# Altium PCB TIDA_010057.PcbDoc (part 4 of 9)
Units mil, origin at the board's own origin, x right, y up, seen from the top; angles counter-clockwise.
Board outline 1771.65 x 3543.31 mil, 12 copper layers (Top Layer, GND1, Signal Layer 1, GND2, POWER1, POWER2, GND4, POWER3, GND6, Signal Layer 2, GND7, Bottom Layer), stack 62.79 mil thick; 593 components, 374 nets, 1805 pads, 1029 vias.
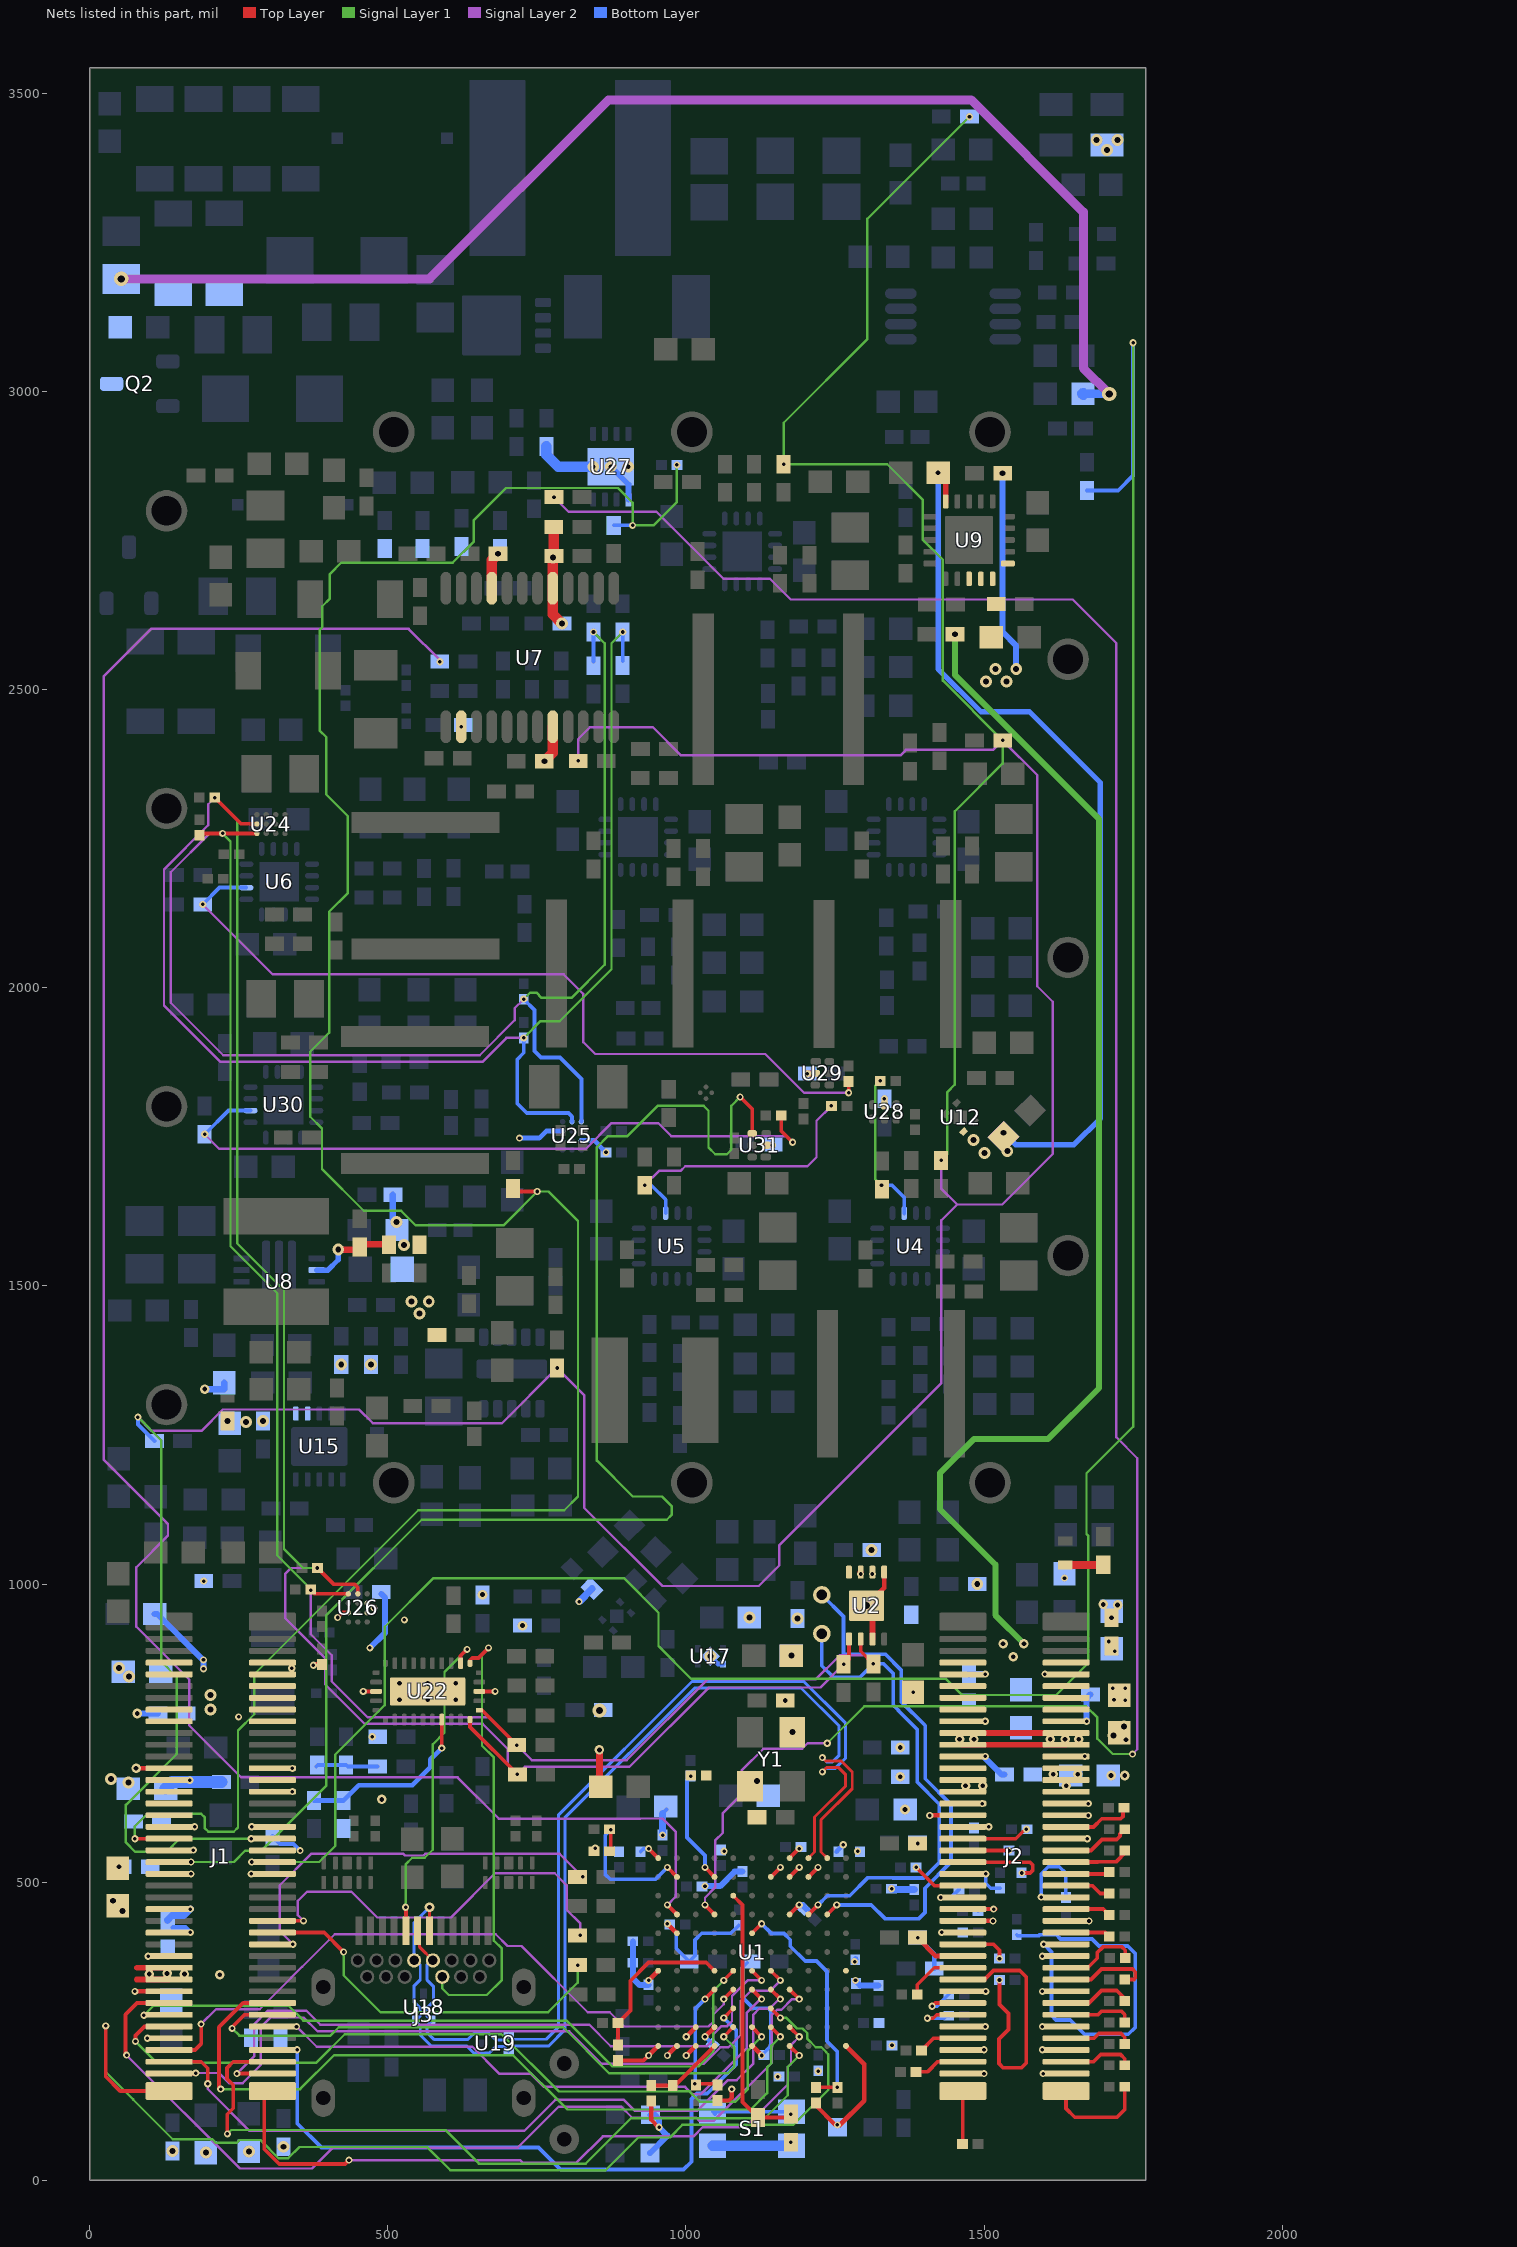
[diagram p13: the nets of this part, all layers, seen from the top]

## Part data (continued)
R49 R56 R65 R72 R96 R112 R128 R134: "RES, 0, 1%, 0.1 W, AEC-Q200 Grade 0, 0603", Manufacturer="Stackpole Electronics Inc", Power_W=0.1, Supplier Part Number 1=RMCF0603ZT0R00CT-ND, TempCo=ppm/C, Tolerance_%=1, Value1=1%, Value2=0.1W, Value_Code=0, AEC Category=Q200, AEC Grade=0, AEC Qualified=Y, ComponentLink1Description="Datasheet link", ComponentLink1URL=https://www.seielect.com/Catalog/SEI-RMCF_RMCP.pdf, CompType=Resistor, Green_EU RoHS="Passed with Exemption", Green_EU RoHS-2=Incomplete, Green_Lifecycle=Active, Green_REACh=Passed, LatestRevisionDate=2017-06-13, MountType=SMT, PackageReference=0603, PartNumber=RMCF0603ZT0R00, Published=2008-06-26, Publisher="Texas Instruments", Res_ohm=0, RoHS=Y, SizeArea_mm2=1.28, SizeX_mm=1.6, SizeY_mm=0.8, SizeZ_mm=1, Supplier 1=Digi-Key, SymbolVersion=2009-05-29, Technology="Thick Film", U/M=EA, ValueDisplayed=0
R50 R74 R97 R104 R129: "RES, 4.99 k, 1%, 0.1 W, AEC-Q200 Grade 0, 0402", Manufacturer=Panasonic, Power_W=0.1, Supplier Part Number 1=P4.99KLCT-ND, TempCo="100 ppm/C", Tolerance_%=1, Value1=1%, Value2=0.1W, Value_Code=4k99, ValueDisplayed=4.99k, AEC Category=Q200, AEC Grade=0, AEC Qualified=Y, ComponentLink1Description="Datasheet link", ComponentLink1URL=http://industrial.panasonic.com/cdbs/www-data/pdf/RDA0000/AOA0000C86.pdf, CompType=Resistor, EIA_Code=E96, Green_EU RoHS="Passed with Exemption", Green_EU RoHS-2=Passed, Green_Lifecycle=Active, Green_REACh=Passed, LatestRevisionDate=2017-06-12, MountType=SMT, PackageReference=0402, PartNumber=ERJ-2RKF4991X, Published=2008-06-26, Publisher="Texas Instruments", Res_ohm=4990, RoHS=Y, SizeArea_mm2=0.5, SizeX_mm=1, SizeY_mm=0.5, SizeZ_mm=0.6, Supplier 1=Digi-Key, Supplier 2=Newark, Supplier 3=Mouser, Supplier Part Number 2=73T6529, Supplier Part Number 3=667-ERJ-2RKF4991X, SymbolVersion=2009-05-29, Technology="Thick Film", U/M=EA, VDC_V=50
R51 R58 R76 R98 R105 R115 R131: "RES, 10.0 k, 1%, 0.063 W, AEC-Q200 Grade 0, 0402", Manufacturer="KOA Speer", Power_W=0.063, Supplier Part Number 1=660-RK73H1ETTP1002F, TempCo="100 ppm/C", Tolerance_%=1, Value1=1%, Value2=0.063W, Value_Code=10k0, ValueDisplayed=10.0k, AEC Category=Q200, AEC Grade=0, AEC Qualified=Y, ComponentLink1Description="Datasheet link", ComponentLink1URL=http://www.koaspeer.com/catimages/Products/RK73H/RK73H.pdf, CompType=Resistor, EIA_Code=E96, LatestRevisionDate=2017-06-12, MountType=SMT, PackageReference=0402, PartNumber=RK73H1ETTP1002F, Published=2008-06-26, Publisher="Texas Instruments", Res_ohm=10000, RoHS=Y, SizeArea_mm2=0.5, SizeX_mm=1, SizeY_mm=0.5, SizeZ_mm=0.6, Supplier 1=Mouser, SymbolVersion=2009-05-29, Technology="Thick Film", U/M=EA, VDC_V=50
R52 R101 R107 R121 R133: "RES, 130, 5%, 0.063 W, 0402", Manufacturer=Vishay-Dale, Power_W=0.063, Supplier Part Number 1=541-130JCT-ND, TempCo="200 ppm/C", Tolerance_%=5, Value1=5%, Value2=0.063W, Value_Code=130R, ValueDisplayed=130, AEC Category=Q200, AEC Qualified=?, ComponentLink1Description="Datasheet link", ComponentLink1URL=http://www.vishay.com/docs/20035/dcrcwe3.pdf, CompType=Resistor, EIA_Code=E24, Green_EU RoHS="Passed with Exemption", Green_EU RoHS-2=Passed, Green_Lifecycle=Active, Green_REACh=Passed, LatestRevisionDate=2017-06-12, MountType=SMT, PackageReference=0402, PartNumber=CRCW0402130RJNED, Published=2008-06-26, Publisher="Texas Instruments", Res_ohm=130, RoHS=Y, SizeArea_mm2=0.5, SizeX_mm=1, SizeY_mm=0.5, SizeZ_mm=0.6, Supplier 1=Digi-Key, Supplier 2=Newark, Supplier 3=Mouser, Supplier Part Number 2=89M6605, Supplier Part Number 3=71-CRCW0402130RJNED, SymbolVersion=2009-05-29, Technology="Thick Film", U/M=EA, VDC_V=50
R54 R71 R126: "RES, 0, 1%, 0.5 W, 0805", Manufacturer=Keystone, Power_W=0.5, Supplier Part Number 1=36-5106CT-ND, TempCo=ppm/C, Tolerance_%=1, Value1=1%, Value2=0.5W, Value_Code=0, AEC Category=Q200, AEC Grade=N/A, AEC Qualified=N, ComponentLink1Description="Datasheet link", ComponentLink1URL=http://www.keyelco.com/product-pdf.cfm?p=14039, CompType=Resistor, LatestRevisionDate=2017-06-23, MountType=SMT, PackageReference=0805, PartNumber=5106, Published=2008-06-26, Publisher="Texas Instruments", Res_ohm=0, RoHS=Y, SizeArea_mm2=2.5, SizeX_mm=2, SizeY_mm=1.25, SizeZ_mm=0.84, Supplier 1=Digi-Key, SymbolVersion=2009-05-29, Technology="Metal Element", U/M=EA, ValueDisplayed=0
R57: "RES, 12.4 k, 1%, 0.063 W, 0402", Manufacturer=Vishay-Dale, Power_W=0.063, Supplier Part Number 1=541-12.4KLCT-ND, TempCo="100 ppm/C", Tolerance_%=1, Value1=1%, Value2=0.063W, Value_Code=12k4, ValueDisplayed=12.4k, AEC Category=Q200, AEC Qualified=?, ComponentLink1Description="Datasheet link", ComponentLink1URL=http://www.vishay.com/docs/20035/dcrcwe3.pdf, CompType=Resistor, EIA_Code=E96, Green_EU RoHS="Passed with Exemption", Green_EU RoHS-2=Passed, Green_Lifecycle=Active, Green_REACh=Passed, LatestRevisionDate=2017-06-12, MountType=SMT, PackageReference=0402, PartNumber=CRCW040212K4FKED, Published=2008-06-26, Publisher="Texas Instruments", Res_ohm=12400, RoHS=Y, SizeArea_mm2=0.5, SizeX_mm=1, SizeY_mm=0.5, SizeZ_mm=0.6, Supplier 1=Digi-Key, Supplier 2=Newark, Supplier 3=Mouser, Supplier Part Number 2=52K6648, Supplier Part Number 3=71-CRCW0402-12.4K-E3, SymbolVersion=2009-05-29, Technology="Thick Film", U/M=EA, VDC_V=50
R59: library part CMP-0026845-3, "RES, 160, 5%, 0.063 W, AEC-Q200 Grade 0, 0402", Manufacturer=Vishay-Dale, Power_W=63mW, Supplier Part Number 1=541-160JCT-ND, TempCo="200 ppm/C", Tolerance_%=5%, Value2=0.063W, Value_Code=160R, ValueDisplayed=160, AEC Category=Q200, AEC Grade=0, AEC Qualified=Y, ComponentLink1Description="Datasheet link", ComponentLink1URL=http://www.vishay.com/docs/20035/dcrcwe3.pdf, CompType=Resistor, EIA_Code=E24, MountType=SMT, PackageReference=0402, PartNumber=CRCW0402160RJNED, Res_ohm=160, RoHS=E, SizeArea_mm2=0.5, SizeX_mm=1, SizeY_mm=0.5, SizeZ_mm=0.6, Supplier 1=Digi-Key, Supplier 2=Mouser, Supplier Part Number 2=71-CRCW0402160RJNED, Technology="Thick Film", Value1=5%, VDC_V=50V
R60 R61 R100 R106 R116 R119 R132: "RES, 383 k, 1%, 0.063 W, 0402", Manufacturer=Vishay-Dale, Power_W=0.063, Supplier Part Number 1=541-383KLCT-ND, TempCo="100 ppm/C", Tolerance_%=1, Value1=1%, Value2=0.063W, Value_Code=383k, AEC Category=Q200, AEC Qualified=?, ComponentLink1Description="Datasheet link", ComponentLink1URL=http://www.vishay.com/docs/20035/dcrcwe3.pdf, CompType=Resistor, EIA_Code=E96, Green_EU RoHS="Passed with Exemption", Green_EU RoHS-2=Passed, Green_Lifecycle=Active, Green_REACh=Passed, LatestRevisionDate=2017-06-12, MountType=SMT, PackageReference=0402, PartNumber=CRCW0402383KFKED, Published=2008-06-26, Publisher="Texas Instruments", Res_ohm=383000, RoHS=Y, SizeArea_mm2=0.5, SizeX_mm=1, SizeY_mm=0.5, SizeZ_mm=0.6, Supplier 1=Digi-Key, Supplier 2=Newark, Supplier 3=Mouser, Supplier Part Number 2=52K7024, Supplier Part Number 3=71-CRCW0402-383K-E3, SymbolVersion=2009-05-29, Technology="Thick Film", U/M=EA, ValueDisplayed=383k, VDC_V=50
R82 R83 R84 R85 R86 R87 R88 R89 R160: "RES, 18, 5%, 0.063 W, 0402", Manufacturer=Vishay-Dale, Power_W=0.063, Supplier Part Number 1=541-18JCT-ND, TempCo="200 ppm/C", Tolerance_%=5, Value1=5%, Value2=0.063W, Value_Code=18R0, ValueDisplayed=18, AEC Category=Q200, AEC Qualified=?, ComponentLink1Description="Datasheet link", ComponentLink1URL=http://www.vishay.com/docs/20035/dcrcwe3.pdf, CompType=Resistor, EIA_Code=E24, Green_EU RoHS="Passed with Exemption", Green_EU RoHS-2=Passed, Green_Lifecycle=Active, Green_REACh=Passed, LatestRevisionDate=2017-06-12, MountType=SMT, PackageReference=0402, PartNumber=CRCW040218R0JNED, Published=2008-06-26, Publisher="Texas Instruments", Res_ohm=18, RoHS=Y, SizeArea_mm2=0.5, SizeX_mm=1, SizeY_mm=0.5, SizeZ_mm=0.6, Supplier 1=Digi-Key, Supplier 2=Newark, Supplier 3=Mouser, Supplier Part Number 2=59M6708, Supplier Part Number 3=71-CRCW0402J-18-E3, SymbolVersion=2009-05-29, Technology="Thick Film", U/M=EA, VDC_V=50
R90 R148 R153 R161 R174 R238: "RES, 200 k, 1%, 0.1 W, 0402", Manufacturer=Panasonic, Power_W=0.1, Supplier Part Number 1=P200KLCT-ND, TempCo="100 ppm/C", Tolerance_%=1, Value1=1%, Value2=0.1W, Value_Code=200k, AEC Category=Q200, AEC Qualified=?, ComponentLink1Description="Datasheet link", ComponentLink1URL=http://industrial.panasonic.com/www-data/pdf/AOA0000/AOA0000CE2.pdf, CompType=Resistor, EIA_Code=E96, Green_EU RoHS="Passed with Exemption", Green_EU RoHS-2=Incomplete, Green_Lifecycle=Active, Green_REACh=Passed, LatestRevisionDate=2017-06-12, MountType=SMT, PackageReference=0402, PartNumber=ERJ-2RKF2003X, Published=2008-06-26, Publisher="Texas Instruments", Res_ohm=200000, RoHS=Y, SizeArea_mm2=0.5, SizeX_mm=1, SizeY_mm=0.5, SizeZ_mm=0.6, Supplier 1=Digi-Key, Supplier 2=Newark, Supplier 3=Mouser, Supplier Part Number 2=73T6488, Supplier Part Number 3=667-ERJ-2RKF2003X, SymbolVersion=2009-05-29, Technology="Thick Film", U/M=EA, ValueDisplayed=200k, VDC_V=50
  R153: VARIANT=DNP
R93: "RES, 44.2 k, 1%, 0.063 W, 0402", Manufacturer=Vishay-Dale, Power_W=0.063, Supplier Part Number 1=541-44.2KLCT-ND, TempCo="100 ppm/C", Tolerance_%=1, Value1=1%, Value2=0.063W, Value_Code=44k2, ValueDisplayed=44.2k, AEC Category=Q200, AEC Qualified=?, ComponentLink1Description="Datasheet link", ComponentLink1URL=http://www.vishay.com/docs/20035/dcrcwe3.pdf, CompType=Resistor, EIA_Code=E96, Green_EU RoHS="Passed with Exemption", Green_EU RoHS-2=Passed, Green_Lifecycle=Active, Green_REACh=Passed, LatestRevisionDate=2017-06-12, MountType=SMT, PackageReference=0402, PartNumber=CRCW040244K2FKED, Published=2008-06-26, Publisher="Texas Instruments", Res_ohm=44200, RoHS=Y, SizeArea_mm2=0.5, SizeX_mm=1, SizeY_mm=0.5, SizeZ_mm=0.6, Supplier 1=Digi-Key, Supplier 2=Newark, Supplier 3=Mouser, Supplier Part Number 2=52K7076, Supplier Part Number 3=71-CRCW0402-44.2K-E3, SymbolVersion=2009-05-29, Technology="Thick Film", U/M=EA, VDC_V=50
R95 R102 R167 R172 R175 R187 R234: "RES, 0, 5%, 0.05 W, 0201", Manufacturer=Panasonic, Power_W=0.05, Supplier Part Number 1=P0.0AGCT-ND, TempCo="600 ppm/C", Tolerance_%=5, Value1=5%, Value2=0.05W, Value_Code=0000, ValueDisplayed=0, AEC Category=Q200, AEC Qualified=?, ComponentLink1Description="Datasheet link", ComponentLink1URL=http://www.panasonic.com/industrial/components/pdf/AOA0000CE1.pdf, CompType=Resistor, EIA_Code=E24, LatestRevisionDate=2017-04-07, MountType=SMT, PackageReference=0201, PartNumber=ERJ-1GE0R00C, Published=2016-10-14, Publisher="Texas Instruments", Res_ohm=0, RoHS=Y, SizeArea_mm2=0.18, SizeX_mm=0.6, SizeY_mm=0.3, SizeZ_mm=0.26, Supplier 1=Digi-Key, Supplier 2=Newark, Supplier 3=Mouser, Supplier Part Number 2=53W4043, Supplier Part Number 3=667-ERJ-1GE0R00C, SymbolVersion=2009-05-29, Technology="Thick Film", U/M=EA, VDC_V=15
R103: library part CMP-0078784-1, "RES, 3.57 k, 1%, 0.063 W, 0402", Manufacturer="Yageo America", Power_W=63mW, Supplier Part Number 1=YAG3150CT-ND, TempCo="100 ppm/C", Tolerance_%=1%, Value2=0.063W, Value_Code=3k57, ValueDisplayed=3.57k, AEC Category=Q200, AEC Grade=N/A, AEC Qualified=N, ComponentLink1Description="Datasheet link", ComponentLink1URL=http://www.yageo.com/documents/recent/PYu-RC_Group_51_RoHS_L_8.pdf, CompType=Resistor, EIA_Code=E96, MountType=SMT, PackageReference=0402, PartNumber=RC0402FR-073K57L, Res_ohm=3.57k, RoHS=Y, SizeArea_mm2=0.5, SizeX_mm=1, SizeY_mm=0.5, SizeZ_mm=0.6, Supplier 1=Digi-Key, Supplier 2=Mouser, Supplier Part Number 2=603-RC0402FR-073K57L, Technology="Thick Film", Value1=1%, VDC_V=50V
R111: library part CMP-0026243-2, "RES, 2.87 k, 1%, 0.063 W, AEC-Q200 Grade 0, 0402", Manufacturer=Vishay-Dale, Power_W=63mW, Supplier Part Number 1=541-2.87KLCT-ND, TempCo="100 ppm/C", Tolerance_%=1%, Value2=0.063W, Value_Code=2k87, ValueDisplayed=2.87k, AEC Category=Q200, AEC Grade=0, AEC Qualified=Y, ComponentLink1Description="Datasheet link", ComponentLink1URL=http://www.vishay.com/docs/20035/dcrcwe3.pdf, CompType=Resistor, EIA_Code=E96, MountType=SMT, PackageReference=0402, PartNumber=CRCW04022K87FKED, Res_ohm=2.87k, RoHS=E, SizeArea_mm2=0.5, SizeX_mm=1, SizeY_mm=0.5, SizeZ_mm=0.6, Supplier 1=Digi-Key, Supplier 2=Newark, Supplier 3=Mouser, Supplier Part Number 2=52K6813, Supplier Part Number 3=71-CRCW0402-2.87K-E3, Technology="Thick Film", Value1=1%, VDC_V=50V
R114: "RES, 7.50 k, 0.1%, 0.063 W, AEC-Q200 Grade 0, 0402", Manufacturer=Panasonic, Power_W=0.063, Supplier Part Number 1=P7.5KDCCT-ND, TempCo="25 ppm/C", Tolerance_%=0.1, Value1=0.1%, Value2=0.063W, Value_Code=7k50, ValueDisplayed=7.50k, AEC Category=Q200, AEC Grade=0, AEC Qualified=Y, ComponentLink1Description="Datasheet link", ComponentLink1URL=http://industrial.panasonic.com/lecs/www-data/pdf/AOA0000/AOA0000CE26.pdf, CompType=Resistor, EIA_Code=E192, LatestRevisionDate=2017-06-12, MountType=SMT, PackageReference=0402, PartNumber=ERA-2AEB752X, Published=2008-06-26, Publisher="Texas Instruments", Res_ohm=7500, RoHS=Y, SizeArea_mm2=0.5, SizeX_mm=1, SizeY_mm=0.5, SizeZ_mm=0.6, Supplier 1=Digi-Key, Supplier 2=Newark, Supplier 3=Mouser, Supplier Part Number 2=49W8962, Supplier Part Number 3=667-ERA-2AEB752X, SymbolVersion=2009-05-29, Technology="Thin Film", U/M=EA, VDC_V=50
R117 R122 R125 R130 R149 R150 R155 R156 R169 R189 R192 R193 R194 R196 R197 R198 R199 R216 R217 R218 R219 R220 R221 R222 R223 R224 R225 R226 R227 R228 R240 R243 R244: "RES, 22, 5%, 0.05 W, 0201", Manufacturer="Yageo America", Power_W=0.05, Supplier Part Number 1=311-22NCT-ND, TempCo="200 ppm/C", Tolerance_%=5, Value1=5%, Value2=0.05W, Value_Code=22R0, ValueDisplayed=22, AEC Category=Q200, AEC Grade=N/A, AEC Qualified=N, ComponentLink1Description="Datasheet link", ComponentLink1URL=http://www.yageo.com/documents/recent/PYu-RC_Group_51_RoHS_L_5.pdf, CompType=Resistor, EIA_Code=E24, LatestRevisionDate=2017-04-07, MountType=SMT, PackageReference=0201, PartNumber=RC0201JR-0722RL, Published=2016-10-14, Publisher="Texas Instruments", Res_ohm=22, RoHS=Y, SizeArea_mm2=0.18, SizeX_mm=0.6, SizeY_mm=0.3, SizeZ_mm=0.26, Supplier 1=Digi-Key, Supplier 2=Mouser, Supplier Part Number 2=603-RC0201JR-0722RL, SymbolVersion=2009-05-29, Technology="Thick Film", U/M=EA, VDC_V=25
R118: library part CMP-0026841-3, "RES, 150, 5%, 0.063 W, AEC-Q200 Grade 0, 0402", Manufacturer=Vishay-Dale, Power_W=63mW, Supplier Part Number 1=541-150JCT-ND, TempCo="200 ppm/C", Tolerance_%=5%, Value2=0.063W, Value_Code=150R, ValueDisplayed=150, AEC Category=Q200, AEC Grade=0, AEC Qualified=Y, ComponentLink1Description="Datasheet link", ComponentLink1URL=http://www.vishay.com/docs/20035/dcrcwe3.pdf, CompType=Resistor, EIA_Code=E24, MountType=SMT, PackageReference=0402, PartNumber=CRCW0402150RJNED, Res_ohm=150, RoHS=E, SizeArea_mm2=0.5, SizeX_mm=1, SizeY_mm=0.5, SizeZ_mm=0.6, Supplier 1=Digi-Key, Supplier 2=Newark, Supplier 3=Mouser, Supplier Part Number 2=59M6705, Supplier Part Number 3=71-CRCW0402J-150-E3, Technology="Thick Film", Value1=5%, VDC_V=50V
R123: "RES, 22, 5%, 0.063 W, 0402", Manufacturer=Vishay-Dale, Power_W=0.063, Supplier Part Number 1=541-22JCT-ND, TempCo="200 ppm/C", Tolerance_%=5, Value1=5%, Value2=0.063W, Value_Code=22R0, ValueDisplayed=22, AEC Category=Q200, AEC Qualified=?, ComponentLink1Description="Datasheet link", ComponentLink1URL=http://www.vishay.com/docs/20035/dcrcwe3.pdf, CompType=Resistor, EIA_Code=E24, LatestRevisionDate=2017-06-12, MountType=SMT, PackageReference=0402, PartNumber=CRCW040222R0JNED, Published=2008-06-26, Publisher="Texas Instruments", Res_ohm=22, RoHS=Y, SizeArea_mm2=0.5, SizeX_mm=1, SizeY_mm=0.5, SizeZ_mm=0.6, Supplier 1=Digi-Key, Supplier 2=Newark, Supplier 3=Mouser, Supplier Part Number 2=59M6716, Supplier Part Number 3=71-CRCW0402J-22-E3, SymbolVersion=2009-05-29, Technology="Thick Film", U/M=EA, VDC_V=50
R137 R163: library part CMP-0023653-3, "RES, 10.0 k, 0.1%, 0.1 W, 0603", Manufacturer="Yageo America", Power_W=100mW, TempCo="25 ppm/C", Tolerance_%=0.1%, Value2=0.1W, Value_Code=10k0, ValueDisplayed=10.0k, AEC Category=Q200, AEC Qualified=?, ComponentLink1Description="Datasheet link", ComponentLink1URL=http://www.yageo.com/pdf/PYu-RT_1-to-0.05_RoHS_L_3.pdf, CompType=Resistor, EIA_Code=E192, LatestRevisionDate=2017-03-09, MountType=SMT, PackageReference=0603, PartNumber=RT0603BRD0710KL, Published=2008-06-26, Publisher="Texas Instruments", Res_ohm=10k, RoHS=Y, SizeArea_mm2=1.28, SizeX_mm=1.6, SizeY_mm=0.8, SizeZ_mm=1, Technology="Thin Film", U/M=EA, Value1=0.1%, VDC_V=75V
R138: "RES, 301 k, 1%, 0.063 W, 0402", Manufacturer=Vishay-Dale, Power_W=0.063, Supplier Part Number 1=541-301KLCT-ND, TempCo="100 ppm/C", Tolerance_%=1, Value1=1%, Value2=0.063W, Value_Code=301k, AEC Category=Q200, AEC Qualified=?, ComponentLink1Description="Datasheet link", ComponentLink1URL=http://www.vishay.com/docs/20035/dcrcwe3.pdf, CompType=Resistor, EIA_Code=E96, Green_EU RoHS="Passed with Exemption", Green_EU RoHS-2=Passed, Green_Lifecycle=Active, Green_REACh=Passed, LatestRevisionDate=2017-06-12, MountType=SMT, PackageReference=0402, PartNumber=CRCW0402301KFKED, Published=2008-06-26, Publisher="Texas Instruments", Res_ohm=301000, RoHS=Y, SizeArea_mm2=0.5, SizeX_mm=1, SizeY_mm=0.5, SizeZ_mm=0.6, Supplier 1=Digi-Key, Supplier 2=Newark, Supplier 3=Mouser, Supplier Part Number 2=52K6959, Supplier Part Number 3=71-CRCW0402-301K-E3, SymbolVersion=2009-05-29, Technology="Thick Film", U/M=EA, ValueDisplayed=301k, VDC_V=50
R139: "RES, 344 k, 0.5%, 0.1 W, 0603", Manufacturer="Yageo America", Power_W=0.1, TempCo="50 ppm/C", Tolerance_%=0.5, Value1=0.5%, Value2=0.1W, Value_Code=344k, AEC Category=Q200, AEC Qualified=?, ComponentLink1Description="Datasheet link", ComponentLink1URL=http://www.yageo.com/pdf/PYu-RT_1-to-0.05_RoHS_L_3.pdf, CompType=Resistor, EIA_Code=E192, LatestRevisionDate=2017-06-13, MountType=SMT, PackageReference=0603, PartNumber=RT0603DRE07344KL, Published=2008-06-26, Publisher="Texas Instruments", Res_ohm=344000, RoHS=Y, SizeArea_mm2=1.28, SizeX_mm=1.6, SizeY_mm=0.8, SizeZ_mm=1, SymbolVersion=2009-05-29, Technology="Thin Film", U/M=EA, ValueDisplayed=344k, VDC_V=75
R140: "RES, 32.4 k, 1%, 0.1 W, 0603", Manufacturer=Vishay-Dale, Power_W=0.1, Supplier Part Number 1=541-32.4KHCT-ND, TempCo="100 ppm/C", Tolerance_%=1, Value1=1%, Value2=0.1W, Value_Code=32k4, ValueDisplayed=32.4k, AEC Category=Q200, AEC Qualified=?, ComponentLink1Description="Datasheet link", ComponentLink1URL=http://www.vishay.com/docs/20035/dcrcwe3.pdf, CompType=Resistor, EIA_Code=E96, Green_EU RoHS="Passed with Exemption", Green_EU RoHS-2=Passed, Green_Lifecycle=Active, Green_REACh=Passed, LatestRevisionDate=2017-06-13, MountType=SMT, PackageReference=0603, PartNumber=CRCW060332K4FKEA, Published=2008-06-26, Publisher="Texas Instruments", Res_ohm=32400, RoHS=Y, SizeArea_mm2=1.28, SizeX_mm=1.6, SizeY_mm=0.8, SizeZ_mm=1, Supplier 1=Digi-Key, Supplier 2=Newark, Supplier 3=Mouser, Supplier Part Number 2=52K8423, Supplier Part Number 3=71-CRCW0603-32.4K-E3, SymbolVersion=2009-05-29, Technology="Thick Film", U/M=EA, VDC_V=75
R141: library part CMP-0023355-2, "RES, 620 k, 0.1%, 0.063 W, 0603", Manufacturer="TE Connectivity", Power_W=63mW, Supplier Part Number 1=A119967CT-ND, TempCo="25 ppm/C", Tolerance_%=0.1%, Value2=0.063W, Value_Code=620k, AEC Category=Q200, AEC Grade=N/A, AEC Qualified=N, ComponentLink1Description="Datasheet link", ComponentLink1URL=http://www.te.com/commerce/DocumentDelivery/DDEController?Action=srchrtrv&DocNm=1773200&DocType=DS&DocLang=English, CompType=Resistor, LatestRevisionDate=2017-03-09, MountType=SMT, PackageReference=0603, PartNumber=CPF0603B620KE, Published=2008-06-26, Publisher="Texas Instruments", Res_ohm=620k, RoHS=Y, SizeArea_mm2=1.24, SizeX_mm=1.55, SizeY_mm=0.8, SizeZ_mm=0.55, Supplier 1=Digi-Key, Supplier 2=Newark, Supplier 3=Mouser, Supplier Part Number 2=95W6868, Supplier Part Number 3=279-CPF0603B620KE1, Technology="Thin Film", U/M=EA, Value1=0.1%, ValueDisplayed=620k, VDC_V=50V
R142: library part CMP-0026789-1, "RES, 86.6 k, 0.1%, 0.063 W, AEC-Q200 Grade 0, 0402", Manufacturer=Panasonic, Power_W=63mW, Supplier Part Number 1=P86.6KDCCT-ND, TempCo="25 ppm/C", Tolerance_%=0.1%, Value2=0.063W, Value_Code=86k6, ValueDisplayed=86.6k, AEC Category=Q200, AEC Grade=0, AEC Qualified=Y, ComponentLink1Description="Datasheet link", ComponentLink1URL=https://industrial.panasonic.com/cdbs/www-data/pdf/RDM0000/AOA0000C237.pdf, CompType=Resistor, EIA_Code=E192, LatestRevisionDate=2017-03-09, MountType=SMT, PackageReference=0402, PartNumber=ERA-2AEB8662X, Published=2008-06-26, Publisher="Texas Instruments", Res_ohm=86.6k, RoHS=Y, SizeArea_mm2=0.5, SizeX_mm=1, SizeY_mm=0.5, SizeZ_mm=0.6, Supplier 1=Digi-Key, Supplier 2=Newark, Supplier 3=Mouser, Supplier Part Number 2=85Y5630, Supplier Part Number 3=667-ERA-2AEB8662X, Technology="Thin Film", U/M=EA, Value1=0.1%, VDC_V=50V
R144 R145 R151 R183 R229 R230: "RES, 4.70 k, 1%, 0.05 W, 0201", Manufacturer=Vishay-Dale, Power_W=0.05, Supplier Part Number 1=541-4.70KAABCT-ND, TempCo="100 ppm/C", Tolerance_%=1, Value1=1%, Value2=0.05W, Value_Code=4k70, ValueDisplayed=4.70k, AEC Category=Q200, AEC Grade=N/A, AEC Qualified=N, ComponentLink1Description="Datasheet link", ComponentLink1URL=http://www.vishay.com/docs/20052/crcw0201e3.pdf, CompType=Resistor, LatestRevisionDate=2017-04-07, MountType=SMT, PackageReference=0201, PartNumber=CRCW02014K70FKED, Published=2016-10-14, Publisher="Texas Instruments", Res_ohm=4700, RoHS=Y, SizeArea_mm2=0.18, SizeX_mm=0.6, SizeY_mm=0.3, SizeZ_mm=0.33, Supplier 1=Digi-Key, Supplier 2=Newark, Supplier 3=Mouser, Supplier Part Number 2=87W8644, Supplier Part Number 3=71-CRCW02014K70FKED, SymbolVersion=2009-05-29, Technology="Thick Film", U/M=EA, VDC_V=30
R152 R159 R166: "RES, 0.02, 1%, 0.5 W, 1206", Manufacturer="Stackpole Electronics Inc", Power_W=0.5, Supplier Part Number 1=CSR1206FK20L0CT-ND, TempCo="100 ppm/C", Tolerance_%=1, Value1=1%, Value2=0.5W, Value_Code=R020, ValueDisplayed=0.02, AEC Category=Q200, AEC Qualified=?, ComponentLink1Description="Datasheet link", ComponentLink1URL=http://www.seielect.com/Catalog/SEI-csr.pdf, CompType=Resistor, EIA_Code=E96, LatestRevisionDate=2017-06-12, MountType=SMT, PackageReference=1206, PartNumber=CSR1206FK20L0, Published=2008-06-26, Publisher="Texas Instruments", Res_ohm=0.02, RoHS=Y, SizeArea_mm2=5.12, SizeX_mm=3.2, SizeY_mm=1.6, SizeZ_mm=1.35, Supplier 1=Digi-Key, SymbolVersion=2009-05-29, Technology="Thick Film", U/M=EA
R164: "RES, 5.11 k, 1%, 0.063 W, 0402", Manufacturer=Vishay-Dale, Power_W=0.063, Supplier Part Number 1=541-5.11KLCT-ND, TempCo="100 ppm/C", Tolerance_%=1, Value1=1%, Value2=0.063W, Value_Code=5k11, ValueDisplayed=5.11k, AEC Category=Q200, AEC Qualified=?, ComponentLink1Description="Datasheet link", ComponentLink1URL=http://www.vishay.com/docs/20035/dcrcwe3.pdf, CompType=Resistor, EIA_Code=E96, Green_EU RoHS="Passed with Exemption", Green_EU RoHS-2=Passed, Green_Lifecycle=Active, Green_REACh=Passed, LatestRevisionDate=2017-06-12, MountType=SMT, PackageReference=0402, PartNumber=CRCW04025K11FKED, Published=2008-06-26, Publisher="Texas Instruments", Res_ohm=5110, RoHS=Y, SizeArea_mm2=0.5, SizeX_mm=1, SizeY_mm=0.5, SizeZ_mm=0.6, Supplier 1=Digi-Key, Supplier 2=Newark, Supplier 3=Mouser, Supplier Part Number 2=52K7119, Supplier Part Number 3=71-CRCW0402-5.11K-E3, SymbolVersion=2009-05-29, Technology="Thick Film", U/M=EA, VDC_V=50
R168: "RES, 909 k, 1%, 0.063 W, 0402", Manufacturer=Vishay-Dale, Power_W=0.063, Supplier Part Number 1=541-909KLCT-ND, TempCo="100 ppm/C", Tolerance_%=1, Value1=1%, Value2=0.063W, Value_Code=909k, AEC Category=Q200, AEC Qualified=?, ComponentLink1Description="Datasheet link", ComponentLink1URL=http://www.vishay.com/docs/20035/dcrcwe3.pdf, CompType=Resistor, EIA_Code=E96, LatestRevisionDate=2017-06-12, MountType=SMT, PackageReference=0402, PartNumber=CRCW0402909KFKED, Published=2008-06-26, Publisher="Texas Instruments", Res_ohm=909000, RoHS=Y, SizeArea_mm2=0.5, SizeX_mm=1, SizeY_mm=0.5, SizeZ_mm=0.6, Supplier 1=Digi-Key, Supplier 2=Newark, Supplier 3=Mouser, Supplier Part Number 2=52K7340, Supplier Part Number 3=71-CRCW0402909KFKED, SymbolVersion=2009-05-29, Technology="Thick Film", U/M=EA, ValueDisplayed=909k, VDC_V=50
R179: "RES, 10.0 k, 1%, 0.063 W, 0402", Manufacturer=Vishay-Dale, Power_W=0.063, Supplier Part Number 1=541-10.0KLCT-ND, TempCo="100 ppm/C", Tolerance_%=1, Value1=1%, Value2=0.063W, Value_Code=10k0, ValueDisplayed=10.0k, AEC Category=Q200, AEC Qualified=?, ComponentLink1Description="Datasheet link", ComponentLink1URL=http://www.vishay.com/docs/20035/dcrcwe3.pdf, CompType=Resistor, EIA_Code=E96, Green_EU RoHS="Passed with Exemption", Green_EU RoHS-2=Passed, Green_Lifecycle=Active, Green_REACh=Passed, LatestRevisionDate=2017-06-12, MountType=SMT, PackageReference=0402, PartNumber=CRCW040210K0FKED, Published=2008-06-26, Publisher="Texas Instruments", Res_ohm=10000, RoHS=Y, SizeArea_mm2=0.5, SizeX_mm=1, SizeY_mm=0.5, SizeZ_mm=0.6, Supplier 1=Digi-Key, Supplier 2=Newark, Supplier 3=Mouser, Supplier Part Number 2=52K6595, Supplier Part Number 3=71-CRCW0402-10K-E3, SymbolVersion=2009-05-29, Technology="Thick Film", U/M=EA, VDC_V=50
R184 R231 R235: "RES, 0, 5%, 0.05 W, AEC-Q200 Grade 0, 0201", Manufacturer=Panasonic, Power_W=0.05, Supplier Part Number 1=P15979CT-ND, TempCo=ppm/C, Tolerance_%=5, Value1=5%, Value2=0.05W, Value_Code=0000, ValueDisplayed=0, AEC Category=Q200, AEC Grade=0, AEC Qualified=Y, ComponentLink1Description="Datasheet link", ComponentLink1URL=https://industrial.panasonic.com/cdbs/www-data/pdf/RDA0000/AOA0000C281.pdf, CompType=Resistor, EIA_Code=E24, LatestRevisionDate=2017-04-07, MountType=SMT, PackageReference=0201, PartNumber=ERJ-1GN0R00C, Published=2016-10-14, Publisher="Texas Instruments", Res_ohm=0, RoHS=Y, SizeArea_mm2=0.18, SizeX_mm=0.6, SizeY_mm=0.3, SizeZ_mm=0.26, Supplier 1=Digi-Key, Supplier 2=Newark, Supplier 3=Mouser, Supplier Part Number 2=51W5934, Supplier Part Number 3=667-ERJ-1GN0R00C, SymbolVersion=2009-05-29, Technology="Thick Film", U/M=EA
R185 R186 R232 R233 R236 R237: library part CMP-0028071-1, "RES, 10.0 k, 1%, 0.05 W, 0201", Manufacturer="Yageo America", Power_W=50mW, Supplier Part Number 1=603-RC0201FS-7D10KL, TempCo="200 ppm/C", Tolerance_%=1%, Value2=0.05W, Value_Code=10k0, ValueDisplayed=10.0k, AEC Category=Q200, AEC Grade=N/A, AEC Qualified=N, ComponentLink1Description="Datasheet link", ComponentLink1URL=http://www.yageo.com/documents/recent/PYu-RC_Group_51_RoHS_L_5.pdf, CompType=Resistor, EIA_Code=E96, LatestRevisionDate=2017-03-09, MountType=SMT, PackageReference=0201, PartNumber=RC0201FS-7D10KL, Published=2016-10-14, Publisher="Texas Instruments", Res_ohm=10k, RoHS=Y, SizeArea_mm2=0.18, SizeX_mm=0.6, SizeY_mm=0.3, SizeZ_mm=0.26, Supplier 1=Mouser, Technology="Thick Film", U/M=EA, Value1=1%, VDC_V=25V
R190: "RES, 102 k, 0.1%, 0.1 W, 0603", Manufacturer="Susumu Co Ltd", Power_W=0.1, Supplier Part Number 1=RG16P102KBCT-ND, TempCo="25 ppm/C", Value1=0.1%, Value2=0.1W, Value_Code=102k, AEC Category=Q200, AEC Qualified=?, ComponentLink1Description="Datasheet link", ComponentLink1URL=http://www.susumu.co.jp/english/pdf/products-j01-01.pdf, CompType=Resistor, EIA_Code=E192, Green_EU RoHS=Passed, Green_EU RoHS-2=Passed, Green_Lifecycle=Active, Green_REACh=Passed, LatestRevisionDate=2017-06-13, MountType=SMT, PackageReference=0603, PartNumber=RG1608P-1023-B-T5, Published=2008-06-26, Publisher="Texas Instruments", Res_ohm=102000, RoHS=Y, SizeArea_mm2=1.28, SizeX_mm=1.6, SizeY_mm=0.8, SizeZ_mm=1, Supplier 1=Digi-Key, Supplier 2=Mouser, Supplier Part Number 2=754-RG1608P-1023-BT5, SymbolVersion=2009-05-29, Technology="Metal Film", Tolerance_%=0.1, U/M=EA, ValueDisplayed=102k, VDC_V=75
R195: "RES, 42.2 k, 1%, 0.1 W, 0603", Manufacturer=Vishay-Dale, Power_W=0.1, Supplier Part Number 1=541-42.2KHCT-ND, TempCo="100 ppm/C", Tolerance_%=1, Value1=1%, Value2=0.1W, Value_Code=42k2, ValueDisplayed=42.2k, AEC Category=Q200, AEC Qualified=?, ComponentLink1Description="Datasheet link", ComponentLink1URL=http://www.vishay.com/docs/20035/dcrcwe3.pdf, CompType=Resistor, EIA_Code=E96, Green_EU RoHS="Passed with Exemption", Green_EU RoHS-2=Passed, Green_Lifecycle=Active, Green_REACh=Passed, LatestRevisionDate=2017-06-13, MountType=SMT, PackageReference=0603, PartNumber=CRCW060342K2FKEA, Published=2008-06-26, Publisher="Texas Instruments", Res_ohm=42200, RoHS=Y, SizeArea_mm2=1.28, SizeX_mm=1.6, SizeY_mm=0.8, SizeZ_mm=1, Supplier 1=Digi-Key, Supplier 2=Newark, Supplier 3=Mouser, Supplier Part Number 2=52K8519, Supplier Part Number 3=71-CRCW0603-42.2K-E3, SymbolVersion=2009-05-29, Technology="Thick Film", U/M=EA, VDC_V=75
R200 R201: "RES, 10.0 k, 0.1%, 0.1 W, 0603", Manufacturer="Yageo America", Power_W=0.1, TempCo="25 ppm/C", Value1=0.1%, Value2=0.1W, Value_Code=10k0, ValueDisplayed=10.0k, AEC Category=Q200, AEC Qualified=?, ComponentLink1Description="Datasheet link", ComponentLink1URL=http://www.yageo.com/pdf/PYu-RT_1-to-0.05_RoHS_L_3.pdf, CompType=Resistor, EIA_Code=E192, Green_EU RoHS="Passed with Exemption", Green_EU RoHS-2=Passed, Green_Lifecycle=Active, Green_REACh=Passed, LatestRevisionDate=2017-06-13, MountType=SMT, PackageReference=0603, PartNumber=RT0603BRD0710KL, Published=2008-06-26, Publisher="Texas Instruments", Res_ohm=10000, RoHS=Y, SizeArea_mm2=1.28, SizeX_mm=1.6, SizeY_mm=0.8, SizeZ_mm=1, SymbolVersion=2009-05-29, Technology="Thin Film", Tolerance_%=0.1, U/M=EA, VDC_V=75
R239: "RES, 25.5 k, 0.1%, 0.1 W, AEC-Q200 Grade 0, 0603", Manufacturer=Panasonic, Power_W=0.1, Supplier Part Number 1=P25.5KDBCT-ND, TempCo="25 ppm/C", Value1=0.1%, Value2=0.1W, Value_Code=25k5, ValueDisplayed=25.5k, AEC Category=Q200, AEC Grade=0, AEC Qualified=Y, ComponentLink1Description="Datasheet link", ComponentLink1URL=http://industrial.panasonic.com/lecs/www-data/pdf/AOA0000/AOA0000CE26.pdf, CompType=Resistor, EIA_Code=E192, Green_EU RoHS=Incomplete, Green_EU RoHS-2=Incomplete, Green_Lifecycle="Not Set", Green_REACh=Incomplete, LatestRevisionDate=2017-06-13, MountType=SMT, PackageReference=0603, PartNumber=ERA-3AEB2552V, Published=2008-06-26, Publisher="Texas Instruments", Res_ohm=25500, RoHS=Y, SizeArea_mm2=1.28, SizeX_mm=1.6, SizeY_mm=0.8, SizeZ_mm=1, Supplier 1=Digi-Key, Supplier 2=Newark, Supplier 3=Mouser, Supplier Part Number 2=55W9518, Supplier Part Number 3=667-ERA-3AEB2552V, SymbolVersion=2009-05-29, Technology="Thin Film", Tolerance_%=0.1, U/M=EA, VDC_V=75
R241: "RES, 1.00 k, 1%, 0.1 W, AEC-Q200 Grade 0, 0603", Manufacturer=Panasonic, Power_W=0.1, Supplier Part Number 1=P1.00KHCT-ND, TempCo="100 ppm/C", Tolerance_%=1, Value1=1%, Value2=0.1W, Value_Code=1k00, ValueDisplayed=1.00k, AEC Category=Q200, AEC Grade=0, AEC Qualified=Y, ComponentLink1Description="Datasheet link", ComponentLink1URL=https://industrial.panasonic.com/cdbs/www-data/pdf/RDA0000/AOA0000C283.pdf, CompType=Resistor, EIA_Code=E96, Green_EU RoHS="Passed with Exemption", Green_EU RoHS-2=Passed, Green_Lifecycle=Active, Green_REACh=Passed, LatestRevisionDate=2017-06-13, MountType=SMT, PackageReference=0603, PartNumber=ERJ-3EKF1001V, Published=2008-06-26, Publisher="Texas Instruments", Res_ohm=1000, RoHS=Y, SizeArea_mm2=1.28, SizeX_mm=1.6, SizeY_mm=0.8, SizeZ_mm=1, Supplier 1=Digi-Key, Supplier 2=Newark, Supplier 3=Mouser, Supplier Part Number 2=64R5308, Supplier Part Number 3=667-ERJ-3EKF1001V, SymbolVersion=2009-05-29, Technology="Thick Film", U/M=EA, VDC_V=75
S1: library part CMP-0002302-1, "Switch, SPST, Off-Mom, 0.05 A, 12 VDC, SMD", CurrentRating_mA=50A, Manufacturer="Wurth Elektronik", Supplier Part Number 1=732-10143-1-ND, Circuit=SPST, ComponentLink1Description="Datasheet URL", ComponentLink1URL=http://katalog.we-online.de/em/datasheet/434153017835.pdf, CompType=Switch, LatestRevisionDate=2017-03-09, MountType=SMT, Orientation="Top Actuated", PackageReference=3.5x2.9mm, PartNumber=434153017835, PositionCount=1, Publisher="Texas Instruments", RoHS=Y, SizeArea_mm2=12.47, SizeAreaWB_mm2=20.67, SizeX_mm=4.3, SizeY_mm=2.9, SizeZ_mm=1.9, Supplier 1=Digi-Key, Supplier 2=Mouser, Supplier Part Number 2=710-434153017835, SwitchFunction=Off-Mom, VDC_V=12V
SCL SDA: library part TP_H0.45P0.75, "Testpoint", Manufacturer="Texas Instruments", ComponentLink1Description="Datasheet Link", ComponentLink1URL="https://sps06.itg.ti.com/sites/KMS/crossdivteams/altium/docs/ComponentDatasheets/testpin with 750um Padsice and 450um drillhole.pdf", CompType=Pad, LatestRevisionDate=2016-03-31, MountType=TH, PackageReference="Test Point, 0.45mm hole size", PartNumber=TP_H0.45P0.75, Publisher="Texas Instruments", SymbolVersion=2010-10-20
U1: library part CMP-0081079-1, "SuperSpeed USB Controller, BGA-121", Manufacturer="Cypress Semiconductor", Supplier Part Number 1=428-3182-ND, ComponentLink1Description="Datasheet URL", ComponentLink1URL=http://www.cypress.com/file/140296/download, MountType=SMT, PackageReference=10x10mm, PartId=1, PartNumber=CYUSB3014-BZXC, RoHS=Y, SizeArea_mm2=100, SizeAreaWB_mm2=144, SizeX_mm=10, SizeY_mm=10, SizeZ_mm=1.7, Supplier 1=Digi-Key, Supplier 2=Newark, Supplier 3=Mouser, Supplier Part Number 2=54W7901, Supplier Part Number 3=727-CYUSB3014-BZXC
U2: library part CMP-0085313-1, "I2C-Compatible, (2-wire) Serial EEPROM, 512-Kbit (65,536 x 8), 8MA2", Manufacturer=Atmel, ComponentLink1Description="Datasheet URL", ComponentLink1URL=http://ww1.microchip.com/downloads/en/devicedoc/atmel-8720-seeprom-at24c512c-datasheet.pdf, MountType=SMT, PackageReference=UDFN-8, PartNumber=AT24C512C-MAHM, RoHS=Y
U3: library part CMP-0071985-2, "40V Wide Vin Low-Side N-Channel Controller for Switching Regulators, DGK0008A (VSSOP-8)", Manufacturer="Texas Instruments", AEC Category=Q200, AEC Qualified=N, Code_JEDEC=MO-187-AA, ComponentLink1Description="Datasheet Link", ComponentLink1URL=http://www.ti.com/lit/ds/symlink/lm3488.pdf, ComponentLink2Description="Product Folder", ComponentLink2URL=http://www.ti.com/product/lm3488, ComponentLink3Description="Online Datasheet", ComponentLink3URL=http://www.ti.com/product/lm3488/datasheet, CompType=IC, High-Reliability=Y, MountType=SMT, PackageDescription=VSSOP-8, PackageReference=DGK0008A, PartNumber=LM3488MMX/NOPB, RoHS=Y, SizeArea_mm2=14.7, SizeAreaWB_mm2=23.6, SizeX_mm=4.9, SizeY_mm=3, SizeZ_mm=1.1
U4 U5 U6 U10 U11 U14 U30: library part CMP-0073970-1, "2.95V to 6V Input, 2A Synchronous Step-Down SWIFT(TM) Converter, RTE0016F (WQFN-16)", Alternate Manufacturer="Texas Instruments", Alternate PartNumber=TPS54218RTET, ComponentLink1Description="Datasheet Link", ComponentLink1URL=http://www.ti.com/lit/ds/symlink/tps54218.pdf, CompType=IC, Footprint Path 6=C:\AltiumLibraries\Footprints\TI\.PcbLib, Green_EU RoHS=Passed, Green_EU RoHS-2=Passed, Green_Lifecycle=Active, Green_REACh=Passed, LatestRevisionDate=2017-06-09, Manufacturer="Texas Instruments", MountType=SMT, PackageDescription=WQFN-16, PackageReference=RTE0016F, PartNumber=TPS54218RTER, Publisher="Texas Instruments", RoHS=Y, SizeArea_mm2=9.0, SizeAreaWB_mm2=16.0, SizeX_mm=3.0, SizeY_mm=3.0, SizeZ_mm=0.8, U/M=EA
U7: library part CMP-0075866-2, "Programmable 4-PLL VCXO Clock Synthesizer with 2.5V or 3.3V LVCMOS Outputs, PW0024A (TSSOP-24)", Alternate Manufacturer="Texas Instruments", Alternate PartNumber=CDCE949PW, Operating Temperature Range="-40 to 85 C", Rating=Catalog, AEC Category=Q200, AEC Qualified=N, ComponentLink1Description="Datasheet Link", ComponentLink1URL=http://www.ti.com/lit/ds/symlink/cdce949.pdf, ComponentLink2Description="Product Folder", ComponentLink2URL=http://www.ti.com/product/cdce949, ComponentLink3Description="Online Datasheet", ComponentLink3URL=http://www.ti.com/product/cdce949/datasheet, CompType=IC, Manufacturer="Texas Instruments", MountType=SMT, PackageDescription=TSSOP-24, PackageReference=PW0024A, PartNumber=CDCE949PWR, RoHS=Y, SizeArea_mm2=49.92, SizeAreaWB_mm2=82.32, SizeX_mm=6.4, SizeY_mm=7.8, SizeZ_mm=1.2
U8: library part CMP-0013943-2, "20 Vout Fully Integration Synchronous Boost Converter with 8 A Switch Current, RNW0013A (VQFN-HR-13)", Alternate Manufacturer="Texas Instruments", Alternate PartNumber=TPS61178RNWT, ComponentLink1Description="Datasheet Link", ComponentLink1URL=https://sps06.itg.ti.com/sites/KMS/crossdivteams/altium/docs/ComponentDatasheets/TPS61178_0120.pdf, CompType=IC, LatestRevisionDate=2017-03-09, Manufacturer="Texas Instruments", MountType=SMT, PackageDescription=VQFN-HR-13, PackageReference=RNW0013A, PartNumber=TPS61178RNWR, Publisher="Texas Instruments", SizeArea_mm2=10.5, SizeAreaWB_mm2=18, SizeX_mm=3.5, SizeY_mm=3, SizeZ_mm=1, U/M=EA
U9: library part CMP-0085416-1, "Single Output LDO, 1.5A, Adj.(0.8 to 3.3V), Any or No Cap, Programmable Soft Start, RGR0020A (VQFN-20)", Alternate Manufacturer="Texas Instruments", Alternate PartNumber=TPS74201RGRR, Operating Temperature Range="-40 to 125 C", Rating=Catalog, AEC Category=Q200, AEC Qualified=N, ComponentLink1Description="Datasheet Link", ComponentLink1URL=http://www.ti.com/lit/ds/symlink/tps74201.pdf, ComponentLink2Description="Product Folder", ComponentLink2URL=http://www.ti.com/product/tps74201, ComponentLink3Description="Online Datasheet", ComponentLink3URL=http://www.ti.com/product/tps74201/datasheet, CompType=IC, Manufacturer="Texas Instruments", MountType=SMT, PackageDescription=VQFN-20, PackageReference=RGR0020A, PartNumber=TPS74201RGRT, RoHS=Y, SizeArea_mm2=12.25, SizeAreaWB_mm2=20.25, SizeX_mm=3.5, SizeY_mm=3.5, SizeZ_mm=1
U12 U23: library part CMP-0076246-1, "250-mA Ultra-Low-Noise, Low-IQ LDO, DQN0004A (X2SON-4)", Alternate Manufacturer="Texas Instruments", ComponentLink1Description="Datasheet Link", ComponentLink1URL=http://www.ti.com/lit/ds/symlink/lp5907.pdf, CompType=IC, Green_EU RoHS=Passed, Green_EU RoHS-2=Passed, Green_Lifecycle=Active, Green_REACh=Passed, LatestRevisionDate=2017-06-09, Manufacturer="Texas Instruments", MountType=SMT, PackageDescription=X2SON-4, PackageReference=DQN0004A, PartNumber=LP5907SNX-3.3/NOPB, Publisher="Texas Instruments", RoHS=Y, SizeArea_mm2=1.0, SizeAreaWB_mm2=4.0, SizeX_mm=1.0, SizeY_mm=1.0, SizeZ_mm=0.4, U/M=EA
U13: library part CMP-0076252-2, "300-mA Low-Noise, Low-IQ LDO, YKA0004ACAC (DSBGA-4)", Alternate Manufacturer="Texas Instruments", ComponentLink1Description="Datasheet Link", ComponentLink1URL=http://www.ti.com/lit/ds/symlink/lp5910.pdf, CompType=IC, LatestRevisionDate=2017-06-09, Manufacturer="Texas Instruments", MountType=SMT, PackageDescription=DSBGA-4, PackageReference=YKA0004ACAC, PartNumber=LP5910-1.2YKAR, Publisher="Texas Instruments", SizeArea_mm2=0.506944, SizeAreaWB_mm2=2.930944, SizeX_mm=0.712, SizeY_mm=0.712, SizeZ_mm=0.4, U/M=EA
U15: library part CMP-0013435-7, "Dual, 150mA, Wide-Vin, Positive and Negative Low-Dropout (LDO) Voltage Regulator, DSC0010J (WSON-10)", Alternate Manufacturer="Texas Instruments", Alternate PartNumber=TPS7A3901DSCT, Operating Temperature Range="-40 to 125 C", Rating=Catalog, AEC Category=Q200, AEC Qualified=N, ComponentLink1Description="Datasheet Link", ComponentLink1URL=http://www.ti.com/lit/ds/symlink/tps7a39.pdf, ComponentLink2Description="Product Folder", ComponentLink2URL=http://www.ti.com/product/tps7a39, ComponentLink3Description="Online Datasheet", ComponentLink3URL=http://www.ti.com/product/tps7a39/datasheet, CompType=IC, Manufacturer="Texas Instruments", MountType=SMT, PackageDescription=WSON-10, PackageReference=DSC0010J, PartNumber=TPS7A3901DSCR, RoHS=Y, SizeArea_mm2=9.0, SizeAreaWB_mm2=16.0, SizeX_mm=3.0, SizeY_mm=3.0, SizeZ_mm=0.8
U16: library part CMP-0065261-6, "36-V 1-A Step-Down DC-DC Nano Module, SIL0010A (uSIP-10)", Alternate Manufacturer="Texas Instruments", Alternate PartNumber=LMZM23601SILT, AEC Category=Q200, AEC Qualified=N, ComponentLink1Description="Datasheet Link", ComponentLink1URL=http://www.ti.com/lit/ds/symlink/lmzm23601.pdf, ComponentLink2Description="Product Folder", ComponentLink2URL=http://www.ti.com/product/lmzm23601, ComponentLink3Description="Online Datasheet", ComponentLink3URL=http://www.ti.com/product/lmzm23601/datasheet, CompType=IC, Manufacturer="Texas Instruments", MountType=SMT, PackageDescription=uSIP-10, PackageReference=SIL0010A, PartNumber=LMZM23601SILR, SizeArea_mm2=11.4, SizeAreaWB_mm2=19.2, SizeX_mm=3.8, SizeY_mm=3.0, SizeZ_mm=1.578
U17: library part CMP-0076242-1, "250-mA Ultra-Low-Noise, Low-IQ LDO, DQN0004A (X2SON-4)", Alternate Manufacturer="Texas Instruments", ComponentLink1Description="Datasheet Link", ComponentLink1URL=http://www.ti.com/lit/ds/symlink/lp5907.pdf, CompType=IC, LatestRevisionDate=2017-06-09, Manufacturer="Texas Instruments", MountType=SMT, PackageDescription=X2SON-4, PackageReference=DQN0004A, PartNumber=LP5907SNX-1.8/NOPB, Publisher="Texas Instruments", RoHS=Y, SizeArea_mm2=1.0, SizeAreaWB_mm2=4.0, SizeX_mm=1.0, SizeY_mm=1.0, SizeZ_mm=0.4, U/M=EA
U18 U19: library part CMP-0043104-2, "ESD Solution for Super-Speed (6 Gbps) USB 3.0 Interface, 2 Channels, -40 to +85 degC, 3-pin SOT (DRT), Green (Rohs & No Sb/Br)", Breakdown Voltage(Min)(V)=9, Differential Capacitance(pF)=0.01, IO Capacitance(Typ)(pF)=0.7, IO Leakage Current(nA)=10, Manufacturer="Texas Instruments", 1394 / Firewire=TRUE, ComponentLink1Description=Datasheet, ComponentLink1URL=http://www.ti.com/general/docs/lit/getliterature.tsp?genericPartNumber=TPD2EUSB30&fileType=pdf, ComponentLink2Description="URL Link1", ComponentLink2URL=SamplesURL:http://www.ti.com/product/tpd2eusb30#samples, DatasheetVersion=SLVSAC2C, Eco-Plan="Green (RoHS & no Sb/Br)", HDMI=TRUE, IEC 61000-4-2 Air-Gap(+/- kV)=8, IEC 61000-4-2 Contact(+/- kV)=8, Mounting Technology="Surface Mount", PackageDescription="3-Flat Lead Plastic Small Outline, 1 x 1 mm (inc leads), 0.35 mm Pitch", PackageReference=DRT0003A, PackageVersion="revD, Jun-2008", PartNumber=TPD2EUSB30DRTR, Serial ATA / eSATA=TRUE, SubFamily="ESD Solution", USB Full Speed=TRUE, USB High Speed=TRUE, USB Super Speed=TRUE
U20 U21: library part CMP-0073613-3, "4-Channel Ultra-Low-Capacitance IEC ESD Protection Diode, DQA0010A (USON-10)", Alternate Manufacturer="Texas Instruments", AEC Category=Q200, AEC Qualified=N, ComponentLink1Description="Datasheet Link", ComponentLink1URL=http://www.ti.com/lit/ds/symlink/tpd4e05u06.pdf, ComponentLink2Description="Product Folder", ComponentLink2URL=http://www.ti.com/product/tpd4e05u06, ComponentLink3Description="Online Datasheet", ComponentLink3URL=http://www.ti.com/product/tpd4e05u06/datasheet, CompType=IC, Green_EU RoHS=Passed, Green_EU RoHS-2=Passed, Green_Lifecycle=Active, Green_REACh=Passed, Manufacturer="Texas Instruments", MountType=SMT, PackageDescription=USON-10, PackageReference=DQA0010A, PartNumber=TPD4E05U06DQAR, RoHS=Y, SizeArea_mm2=2.5, SizeAreaWB_mm2=7.0, SizeX_mm=1.0, SizeY_mm=2.5, SizeZ_mm=0.55
U22: library part CMP-0076040-1, "USB Type-C DRP Port Controller with SuperSpeed 2:1 MUX, RNH0030A (WQFN-30)", Alternate Manufacturer="Texas Instruments", Alternate PartNumber=HD3SS3220IRNHT, ComponentLink1Description="Datasheet Link", ComponentLink1URL=http://www.ti.com/lit/ds/symlink/hd3ss3220.pdf, CompType=IC, LatestRevisionDate=2017-06-09, Manufacturer="Texas Instruments", MountType=SMT, PackageDescription=WQFN-30, PackageReference=RNH0030A, PartNumber=HD3SS3220IRNHR, Publisher="Texas Instruments", RoHS=Y, SizeArea_mm2=11.25, SizeAreaWB_mm2=19.25, SizeX_mm=2.5, SizeY_mm=4.5, SizeZ_mm=0.8, U/M=EA
U24 U25 U26: library part CMP-0065450-1, "28-V, Bi-Directional, Zero-Drift, Low-/High-Side, I2C Out Current/Power Monitor w/ Alert in WCSP, YFF0012AKAD (DSBGA-12)", Alternate Manufacturer="Texas Instruments", Alternate PartNumber=INA231AIYFFT, ComponentLink1Description="Datasheet Link", ComponentLink1URL=http://www.ti.com/lit/ds/symlink/ina231.pdf, CompType=IC, Footprint Path 6=C:\AltiumLibraries\Footprints\TI\.PcbLib, Green_EU RoHS=Passed, Green_EU RoHS-2=Passed, Green_Lifecycle=Active, Green_REACh=Passed, LatestRevisionDate=2017-06-09, Manufacturer="Texas Instruments", MountType=SMT, PackageDescription=DSBGA-12, PackageReference=YFF0012AKAD, PartNumber=INA231AIYFFR, Publisher="Texas Instruments", RoHS=Y, SizeArea_mm2=2.281872, SizeAreaWB_mm2=6.313872, SizeX_mm=1.388, SizeY_mm=1.644, SizeZ_mm=0.625, U/M=EA
U27: library part CMP-0065664-2, "40 MHz Dual Clock Buffer, NGQ0008A (WSON-8)", Alternate Manufacturer="Texas Instruments", AEC Category=Q200, AEC Qualified=N, ComponentLink1Description="Datasheet Link", ComponentLink1URL=http://www.ti.com/lit/ds/symlink/lmv112.pdf, ComponentLink2Description="Product Folder", ComponentLink2URL=http://www.ti.com/product/lmv112, ComponentLink3Description="Online Datasheet", ComponentLink3URL=http://www.ti.com/product/lmv112/datasheet, CompType=IC, Manufacturer="Texas Instruments", MountType=SMT, PackageDescription=WSON-8, PackageReference=NGQ0008A, PartId=1, PartNumber=LMV112SD/NOPB, RoHS=Y, SizeArea_mm2=9.0, SizeAreaWB_mm2=16.0, SizeX_mm=3.0, SizeY_mm=3.0, SizeZ_mm=0.8
U28 U29 U31: library part CMP-0051217-4, "Single 3-Input Positive-AND Gate, DRY0006A (USON-6)", F @ Nom Voltage(Max)(Mhz)=150, Generic Part Number=SN74LVC1G11, ICC @ Nom Voltage(Max)(mA)=0.01, Manufacturer="Texas Instruments", Operating Temperature Range="-40 to 125 C", Operating Temperature Range(C)="-40 to 125,-40 to 85", Rating=Catalog, tpd @ Nom Voltage(Max)(ns)=20,7.8,6.2,4.6, Voltage(Nom)(V)=1.8,2.5,3.3,5, 3-State Output=No, AEC Category=Q200, AEC Qualified=N, Bits(#)=1, ComponentLink1Description="Datasheet Link", ComponentLink1URL=http://www.ti.com/lit/ds/symlink/sn74lvc1g11.pdf, ComponentLink2Description="Product Folder", ComponentLink2URL=http://www.ti.com/product/sn74lvc1g11, ComponentLink3Description="Online Datasheet", ComponentLink3URL=http://www.ti.com/product/sn74lvc1g11/datasheet, CompType=IC, Gate Type=AND, Input Type=CMOS/TTL, Logic=True, MountType=SMT, Output Drive (IOL/IOH)(Max)(mA)=32/-32, Output Type=CMOS, PackageDescription=USON-6, PackageReference=DRY0006A, PartId=1, PartNumber=SN74LVC1G11DRYR, Schmitt Trigger=No, SizeArea_mm2=1.45, SizeAreaWB_mm2=4.9, SizeX_mm=1.0, SizeY_mm=1.45, SizeZ_mm=0.6, Technology Family=LVC, VCC(Max)(V)=5.5, VCC(Min)(V)=1.65
Y1: library part CMP-0086322-1, "Crystal, 19.2 MHz, 20 ppm, 18 pF, SMD", Frequency_Fixed=19.2MHz, Frequency Stability="50 ppm", Frequency Tolerance="20 ppm", Load Capacitance="18 pF", Manufacturer="ECS Inc.", AEC Category=Q200, AEC Grade=N/A, AEC Qualified=N, ComponentLink1Description="Datasheet Link", ComponentLink1URL=http://www.ecsxtal.com/store/pdf/ecx-32.pdf, CompType=Crystal, MountType=SMT, PackageReference=3.2x2.5mm, PartNumber=ECS-192-18-33-JEM-TR, RoHS=Y, TaMax_C=70°C, TaMin_C=-20°C
ZZ1: library part AssemblyNoteLabel, ClassName=AssemblyNote, CompType=AssemblyNote, LatestRevisionDate=2017-05-23, Publisher="Texas Instruments", SymbolCreator=a0412235, SymbolVersion=2012-06-14
ZZ2 ZZ3 ZZ4: library part AssemblyNote, ClassName=AssemblyNote, CompType=AssemblyNote, LatestRevisionDate=2017-05-23, Publisher="Texas Instruments", SymbolCreator=codlsc, SymbolVersion=2010-05-18
LOGO4: LatestRevisionDate=2016-03-21, Published=2009-03-03, Publisher="Texas Instruments", SymbolCreator=a0412235, SymbolVersion=2014-07-08

## Via types
v1: diameter 12, hole 6, Top Layer to Bottom Layer, tented both sides, 424 vias
v2: diameter 20, hole 10, Top Layer to Bottom Layer, tented both sides, 401 vias
v3: diameter 16, hole 8, Top Layer to Bottom Layer, tented both sides, 96 vias
v4: diameter 24, hole 12, Top Layer to Bottom Layer, tented both sides, 28 vias
v5: diameter 20, hole 10, Top Layer to Bottom Layer, 28 vias
v6: diameter 40, hole 20, Top Layer to Bottom Layer, tented both sides, 23 vias
v7: diameter 19.68, hole 7.87, Top Layer to Bottom Layer, 17 vias
v8: diameter 19.68, hole 7.87, Top Layer to Bottom Layer, tented both sides, 10 vias
v9: diameter 32, hole 16, Top Layer to Bottom Layer, tented both sides, 1 vias
v10: diameter 13, hole 6, Top Layer to Bottom Layer, tented both sides, 1 vias

## Nets (pads, with @x,y where several pads share a name; then routed paths per layer and width w, separated by ;. In a path a pad name is that pad's centre, name@x,y a point inside that pad or via, vN(x,y) a via of type N, cw(c..) or ccw(c..) an arc to the next point about the centre after c; other vN are vias at no path point)
1.8V_AVDD: C92.2 J2.51 J2.52 J2.53 J2.54 J2.55 J2.56 L15.2
  other v3: 1469,662 1498,662 1638,662 1616,681 1657.34,681
1.8V_AVDD_VCA: C93.2 J2.59 J2.60 J2.61 J2.62 L16.2 | length 346.5
  Top Layer w9.8: J2.59@1464.43,730.55 J2.60@1637.65,730.55 ; J2.61@1464.43,750.23 J2.62@1637.65,750.23
  other v3: 1459,740 1483,740 1611,740 1636,740 1659,740
1V2_DVDD: C112.2 J1.19 J1.21 L41.1 | length 108.1
  Top Layer w9.8: 79.16,336.84 J1.19@133.37,336.84 ; 79.53,356.53 J1.21@133.37,356.53
  other v3: 100,346 159,346 130,347
1V8_AVDD_IO_TX: C151.2 J1.68 J1.70 L26.1
  other v2: 203,790 203,814
1V8_DVDD: C91.2 J1.47 J1.49 L14.2 | length 4.9
  Bottom Layer w7: v3(49.5,526) C91.2@54.38,526
1V8_VDD_RX: C85.1 C95.2 L14.1 L15.1 L16.1 L26.2 R93.2 R103.2 U9.1 U9.18 U9.19 U9.20 | length 2372.8
  Signal Layer 1 w10: v2(1451.13,2593) 1451.13,2524.87 1693,2283 1693,1329 1607,1243 1483,1243 1426,1186 1426,1126 1519,1033 1519,948 v3(1567,900)
  Bottom Layer w10: v2(1531.24,2863) 1531.24,2596.76 1554,2574 v2(1554,2534.5)
  other v2: 55,452 39,469 66,845 49,859 1503.5,2514 1538,2514 1519.5,2534.5
  other v3: 1713,679 1736,679 1549,878 1532,900
3.3V: C99.1 C108.1 C109.1 L40.1 U9.10 U12.1 | length 1484.9
  Top Layer w9: v3(1423,2864) 1435.63,2851.37 U9.10@1435.63,2815.96
  Bottom Layer w9: v3(1423,2864) 1422.95,2863.95 1422.95,2535.05 1495,2463 1576,2463 1695,2344 1695,1781 1651,1737 1553,1737 v2(1533,1757)
  other v2: 1717,746 1735,761 1501,1723 1539,1726 1482,1745
  other v3: 1738,739
3.3V_AVDD: C213.2 J2.65 J2.66 J2.67 J2.68 L40.2
  other v1: 1737,805 1718,806 1716,825 1737,825
ADDR: R180.1 R182.1 U22.22 | length 306.4